# Altium PCB BRAKE_rev0.PcbDoc
Units mil, origin at the board's own origin, x right, y up, seen from the top; angles counter-clockwise.
Board outline 4575 x 4702.5 mil, 2 copper layers (Top Layer, Bottom Layer); 45 components, 63 nets, 192 pads, 24 vias.
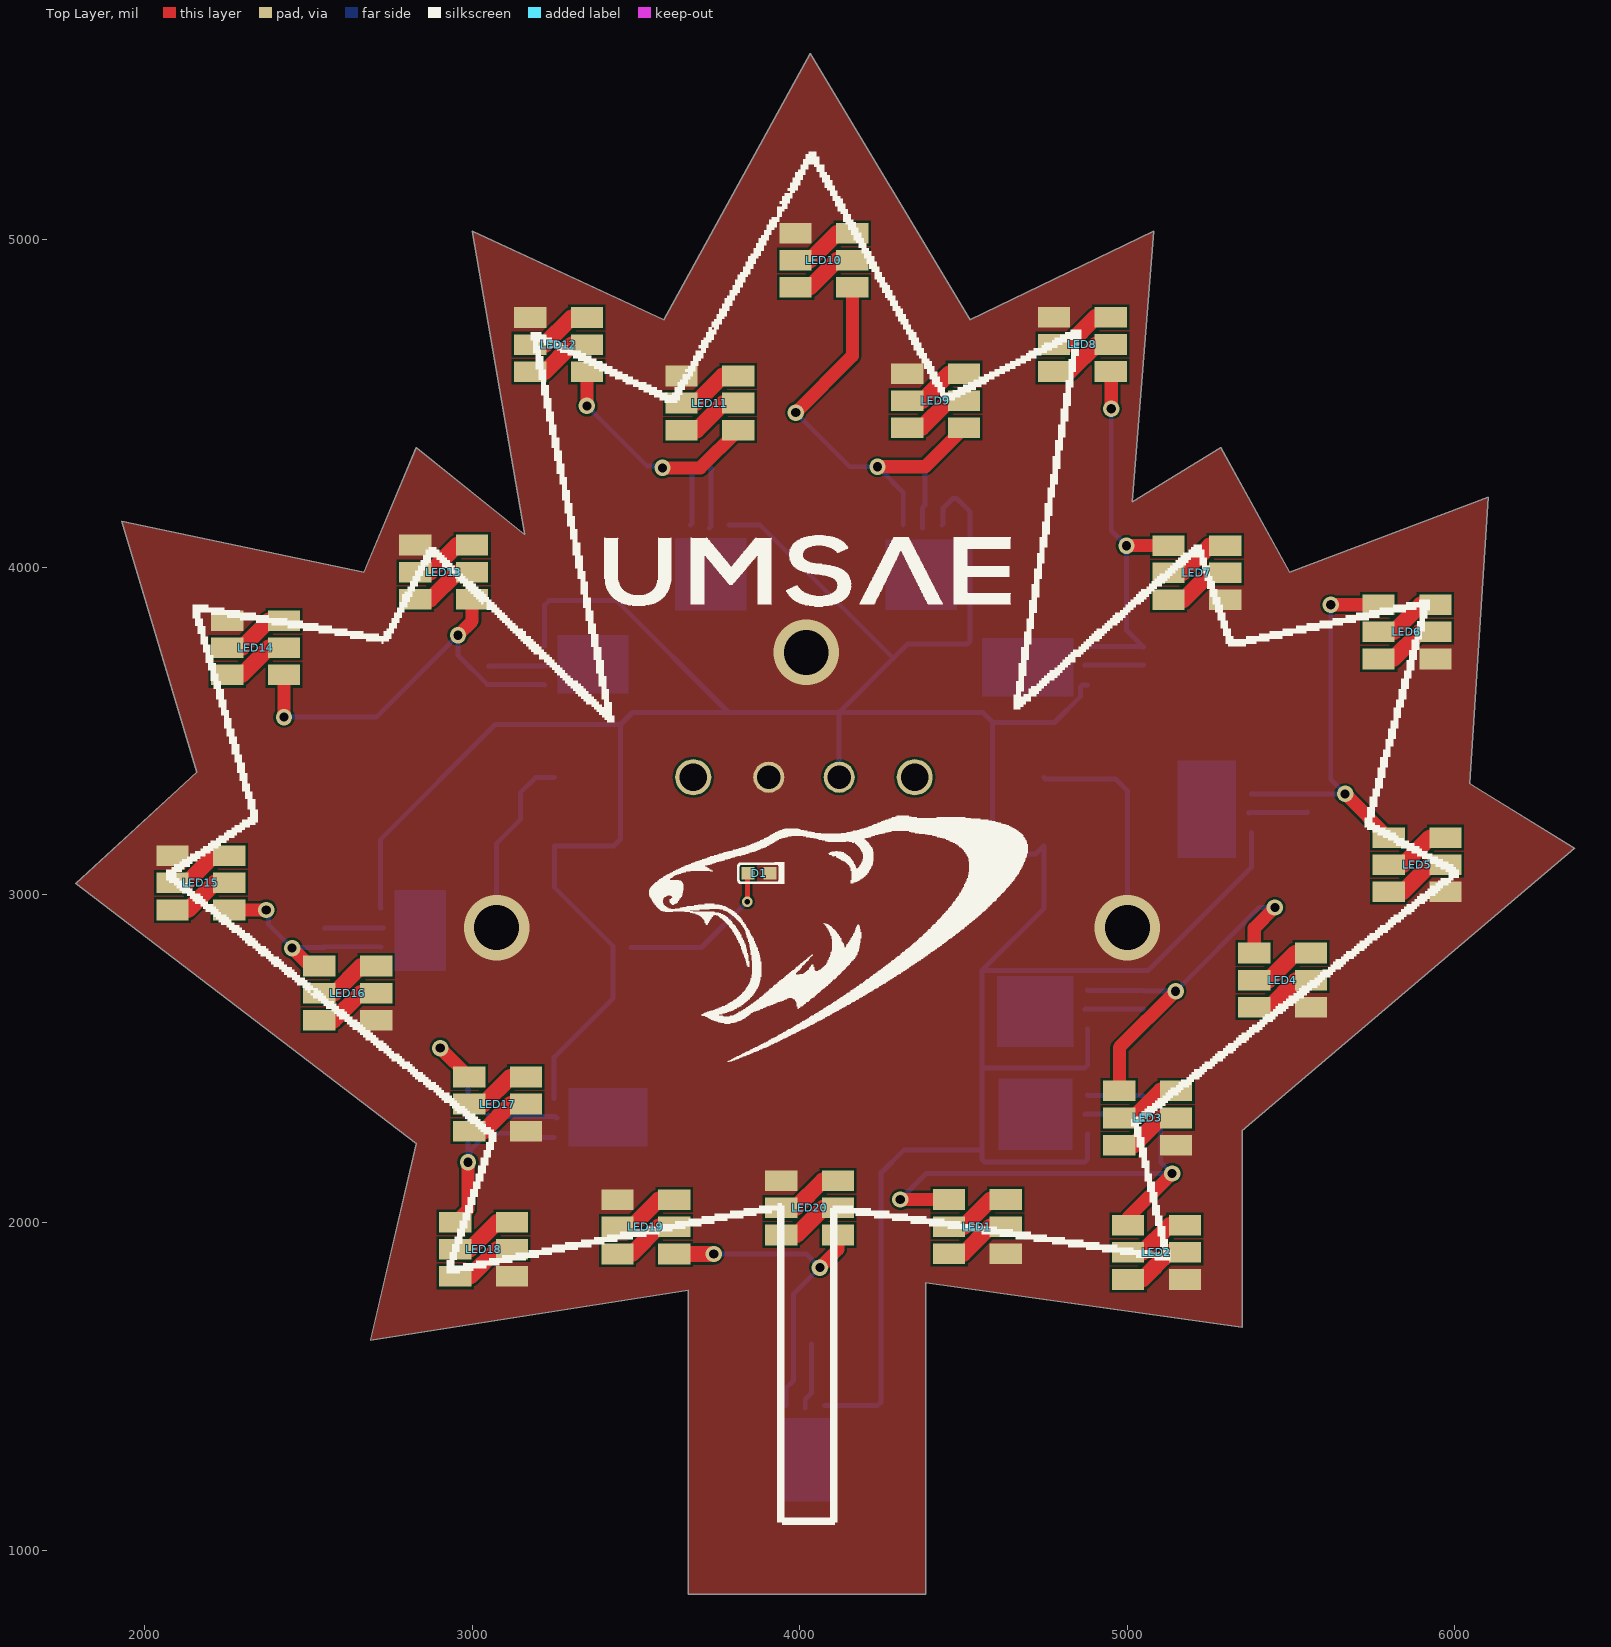
[diagram p0: Top Layer view]
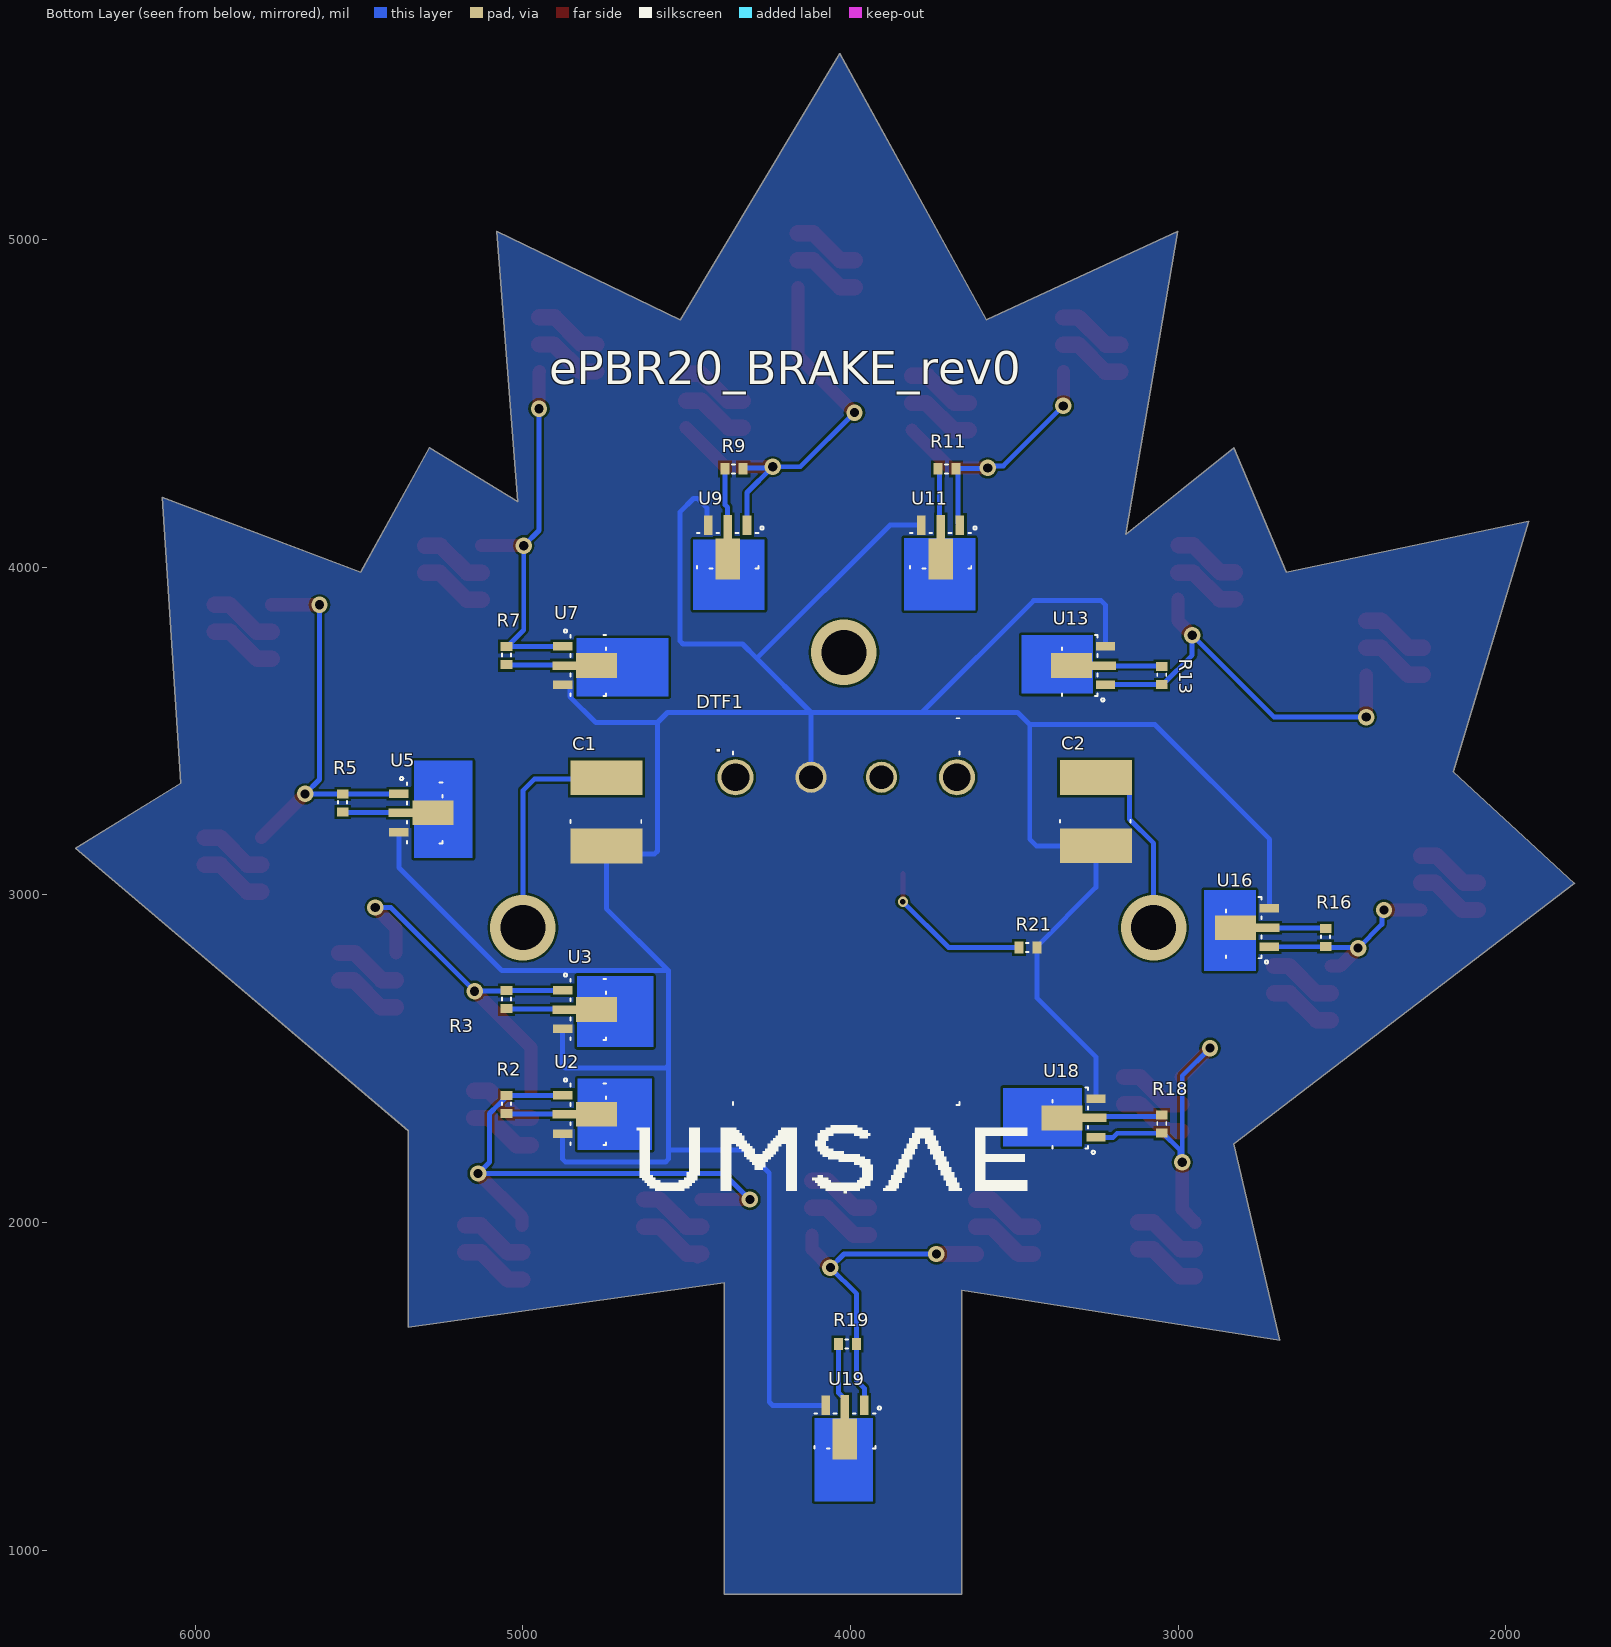
[diagram p1: Bottom Layer view, seen from below]

## Layer stack, top to bottom
Top Solder: solder mask 0.4, Solder Resist, Dk 3.5
Top Layer: signal copper 1.4
Dielectric 1: dielectric 12.6, FR-4, Dk 4.8
Bottom Layer: signal copper 1.4
Bottom Solder: solder mask 0.4, Solder Resist, Dk 3.5

## Board outline
3660,865 4385,865 4385,1816.65 5350,1679.78 5350,2280 6365,3142.5 6045,3340 6101.25,4213.75 5495,3985 5285,4365 5015,4200 5080,5025.84 4520,4755 4032.5,5567.5 3585,4755 3000.84,5025.84 3160,4100 2830,4365 2670,3985 1930,4140 2160,3375 1790,3035 2830,2240 2689.92,1640.52 3660,1793.56

## Design rules (kind name [scope] priority, off if disabled: settings)
Clearance [All] p1: gap=7 ignorepadtopadclearanceinfootprint=FALSE except(0: Arc-Hole Track-Hole SMDPad-Hole THPad-Hole Via-Hole Fill-Hole Poly-Hole Region-Hole Text-Hole)
HoleSize [All] p1: absolutevalues=TRUE maxlimit=200 minlimit=15 maxpercent=80.000 minpercent=20.000
HoleToHoleClearance [All] p1: gap=8 allowstackedmicrovias=TRUE
MinimumAnnularRing MinimumAnnularRing_Pad [IsPad] p1: minimumring=7
MinimumAnnularRing MinimumAnnularRing_Via [IsVia] p2: minimumring=5
MinimumSolderMaskSliver [All] p1: minsoldermaskwidth=4
PlaneClearance [All] p1: clearance=15
PlaneConnect PlaneConnect_12V [InNet('12V')] p1: planeconnectstyle=Direct reliefexpansion=20 reliefentries=4 reliefconductorwidth=20 reliefairgap=10
PlaneConnect PlaneConnect_1 [All] p2: planeconnectstyle=Relief reliefexpansion=15 reliefentries=4 reliefconductorwidth=15 reliefairgap=10
PolygonConnect [All] p1: connectstyle=Direct reliefconductorwidth=15 reliefentries=4 polygonreliefangle="90 Angle" airgapwidth=10
RoutingVias [All] p1: holewidth=17 width=31 viastyle="Through Hole" minholewidth=15 minwidth=29 maxholewidth=50 maxwidth=100
SilkToSilkClearance [All] p1: silktosilkclearance=7
SilkToSolderMaskClearance [IsPad] p1: minsilkscreentomaskgap=2 clearancetoexposedcopper=TRUE
SolderMaskExpansion [All] p1: expansion=3
Width [All] p1: maxlimit=200 minlimit=7 preferedwidth=15
23 further rules are at their usual default settings.

## Components (designator, comment, footprint, x,y, rotation, side; value= is the part's Value field where it differs from the comment)
C1 "Cap Semi" "2J-Lead 6.1 x 5.3" 4745,3255.3 r90 bottom value=33uF
C2 "Cap Semi" "2J-Lead 6.1 x 5.3" 3251,3256 r90 bottom value=33uF
D1 "BEAR EYE" TOSH-0603LED_RED_V 3876,3066 r180 top
DTF1 "DTF13-2P" DTF13-2P 4013,3359 r0 bottom
LED1 "3 LEDs" "3 CHANNEL LED" 4542.52,1987.4 r0 top
LED2 "3 LEDs" "3 CHANNEL LED" 5088.98,1908.66 r0 top
LED3 "3 LEDs" "3 CHANNEL LED" 5062.2,2318.9 r0 top
LED4 "3 LEDs" "3 CHANNEL LED" 5474.02,2739.76 r0 top
LED5 "3 LEDs" "3 CHANNEL LED" 5884.65,3092.13 r0 top
LED6 "3 LEDs" "3 CHANNEL LED" 5853.54,3802.76 r0 top
LED7 "3 LEDs" "3 CHANNEL LED" 5212.2,3983.07 r0 top
LED8 "3 LEDs" "3 CHANNEL LED" 4862.99,4679.92 r180 top
LED9 "3 LEDs" "3 channel led" 4414.96,4508.27 r180 top
LED10 "3 LEDs" "3 CHANNEL LED" 4074.02,4937.01 r180 top
LED11 "3 LEDs" "3 CHANNEL LED" 3725.59,4501.18 r180 top
LED12 "3 LEDs" "3 CHANNEL LED" 3263.78,4679.53 r180 top
LED13 "3 LEDs" "3 CHANNEL LED" 2913.39,3985 r180 top
LED14 "3 LEDs" "3 channel led" 2339.37,3753.94 r180 top
LED15 "3 LEDs" "3 CHANNEL LED" 2172.05,3036.61 r180 top
LED16 "3 LEDs" "3 CHANNEL LED" 2620.47,2700 r0 top
LED17 "3 LEDs" "3 channel led" 3077.56,2361.42 r0 top
LED18 "3 LEDs" "3 CHANNEL LED" 3035.04,1918.11 r0 top
LED19 "3 LEDs" "3 CHANNEL LED" 3530.31,1986.61 r180 top
LED20 "3 LEDs" "3 channel led" 4030.31,2044.49 r180 top
R2 "18" RESC0603(1608)_L 5050,2360 r270 bottom
R3 "18" RESC0603(1608)_L 5050,2680 r270 bottom
R5 "18" RESC0603(1608)_L 5550,3280 r270 bottom
R7 "18" RESC0603(1608)_L 5050,3730 r270 bottom
R9 "18" RESC0603(1608)_L 4355,4300 r0 bottom
R11 "18" RESC0603(1608)_L 3705,4300 r0 bottom
R13 "18" RESC0603(1608)_L 3050,3670 r90 bottom
R16 "18" RESC0603(1608)_L 2550,2870 r90 bottom
R18 "18" RESC0603(1608)_L 3050,2300 r90 bottom
R19 "18" RESC0603(1608)_L 4009,1629 r0 bottom
R21 "430" RESC0603(1608)_L 3458,2839.37 r180 bottom
U2 "LM317LCPK" LM317LCPK 4800,2330 r270 bottom
U3 "LM317LCPK" LM317LCPK 4800,2650 r270 bottom
U5 "LM317LCPK" LM317LCPK 5300,3250 r270 bottom
U7 "LM317LCPK" LM317LCPK 4800,3700 r270 bottom
U9 "LM317LCPK" LM317LCPK 4375,4050 r0 bottom
U11 "LM317LCPK" LM317LCPK 3725,4050 r0 bottom
U13 "LM317LCPK" LM317LCPK 3300,3700 r90 bottom
U16 "LM317LCPK" LM317LCPK 2800,2900 r90 bottom
U18 "LM317LCPK" LM317LCPK 3329,2319 r90 bottom
U19 "LM317LCPK" LM317LCPK 4016.94,1363.5 r0 bottom

## Footprints (in the part's own frame and the unit in brackets; to place one, negate y for a bottom-side part, rotate by r counter-clockwise, add the part's x,y. Pads: shape width x height; smd on the part's side, far side on the other; paste and mask are expansions set on the pad)
"2J-Lead 6.1 x 5.3" [mm]
  rect 2.7x5.6 smd: 1(-2.7,0) 2(2.6,0)
  silkscreen extent -0.9,-2.7 -0.69,2.8, body extent -3.4,-2.8 3.3,2.8, height 5
"3 CHANNEL LED" [mm]
  rect 2.5x1.6 smd: 1(-2.2,2.1) 2(-2.2,0) 3(-2.2,-2.1) 4(2.2,-2.1) 5(2.2,0) 6(2.2,2.1)
  body extent -2.1,-2.8 2.2,2.8, height 2.5
"3 channel led" [mm]
  rect 2.5x1.6 smd: 1(-2.2,2.1) 2(-2.2,0) 3(-2.2,-2.1) 4(2.2,-2.1) 5(2.2,0) 6(2.2,2.1)
  body extent -2.1,-2.8 2.2,2.8, height 2.5
DTF13-2P [mil]
  round 95 hole 72: 1(107.5,0) 2(-107.5,0)
  round 110 hole 84.02: MH(-338,0) MH(338,0)
  silkscreen extent -345,-180 345,1000, body extent -460,-180 466,1010, height 770
LM317LCPK [mil]
  rect 26x59 smd: 1(-59.06,-78.5) 3(59.06,-78.5)
  rect 26x80 smd: 2(0,-70)
  rect 75x125 smd: 2(0,25)
  silkscreen extent -110,-75 94,54, body extent -87,-93 90,73, height 65
RESC0603(1608)_L [mm]
  rect 0.7x0.9 smd: 1(-0.7,0) 2(0.7,0)
  silkscreen extent -0.16,-0.35 0.05,0.35, body extent -0.85,-0.47 0.85,0.47, height 0.6
TOSH-0603LED_RED_V [mm] "SMT LED, 2-Leads, Body 1.6x0.8mm (0603-Size)"
  rect 1x1 smd paste+0 mask+0: 1(0.85,0) 2(-0.85,0)
  silkscreen extent -1.97,-0.85 1.6,0.85, body extent -0.92,-0.53 1.09,0.53, height 0.6

## Part data
C1 C2: "Capacitor (Semiconductor SIM Model)", Supplier Part Number 1=490-5834-1-ND, LatestRevisionDate=29-May-2009, LatestRevisionNote="IPC-7351 Footprint Added.", PackageDescription="Chip Capacitor", PackageReference=C1206, Published=8-Jun-2000, Publisher="Altium Limited", Supplier 1=Digi-Key
D1: library part CMP-0444-00001-1, "LED, Red 0603 (1608) 63mCd", Forward Current="25 mA", Manufacturer=Toshiba, PartNumber=TLSU1008A(T04), Power Dissipation="60 mW", Reverse Voltage="4 V", Storage Temperature="-40 to 100 degC", Supplier Part Number 1=475-2512-1-ND, ComponentLink1Description="Manufacturer URL", ComponentLink1URL=http://www.toshiba-components.com/, ComponentLink2Description=Datasheet, ComponentLink2URL=http://www.semicon.toshiba.co.jp/info/docget.jsp?type=datasheet&lang=en&pid=TLSU1008A(T04), DatasheetVersion=Aug-08, Mounting Technology="Surface Mount", PackageDescription="2-Pin SMT LED, 1.6 x 0.8 mm Pitch", PackageReference=0603LED_RED, Packing Type=Reel, Supplier 1=Digi-Key
DTF1: "DEUTSCH Automotive; DT RECP ASM", Package=None, Digi-Key_Part_Number=1734-1033-ND, Digi-Key_Purchase_URL=https://www.digikey.ca/product-detail/en/te-connectivity-deutsch-connectors/DTF13-2P/1734-1033-ND/6566597?utm_source=snapeda&utm_medium=aggregator&utm_campaign=symbol, EU_RoHS_Compliance="Compliant with Exemptions", MF="TE Connectivity", MP=DTF13-2P, SnapEDA_Link=https://www.snapeda.com/parts/DTF13-2P/TE%20Connectivity%20Deutsch%20Connectors/view-part/?ref=snap, TE_purchase_URL=https://www.te.com/usa-en/product-DTF13-2P.html?te_bu=Cor&te_type=disp&te_campaign=seda_glo_cor-seda-global-disp-prtnr-fy19-seda-model-bom-cta_sma-317_1&elqCampaignId=32493
LED1 LED2 LED3 LED4 LED5 LED6 LED7 LED8 LED9 LED10 LED11 LED12 LED13 LED14 LED15 LED16 LED17 LED18 LED19 LED20: library part CLP6C-RKW-CYBA0AA3, Supplier Part Number 1=CLP6C-RKW-CYBA0AA3CT-ND, Supplier 1=Digi-Key
R2 R3 R5 R7 R9 R11 R13 R16 R18 R19: library part CMP-1591-00001-1, "0603 (1608 Metric) Chip Resistor", Case-EIA=0603, Case-Metric=1608, Supplier Part Number 1=P17.4AATR-ND, PackageReference=RESC0603(1608), Supplier 1=Digi-Key
R21: library part CMP-1591-00001-1, "0603 (1608 Metric) Chip Resistor", Case-EIA=0603, Case-Metric=1608, Supplier Part Number 1=P430BZCT-ND, PackageReference=RESC0603(1608), Supplier 1=Digi-Key
U2 U3 U5 U7 U9 U11 U13 U16 U18 U19: Supplier Part Number 1=296-26093-1-ND, Supplier 1=Digi-Key

## Via types
v1: diameter 50, hole 28, Top Layer to Bottom Layer, 20 vias
v2: diameter 200, hole 137, Top Layer to Bottom Layer, 3 vias
v3: diameter 31, hole 17, Top Layer to Bottom Layer, 1 vias

## Nets (pads, with @x,y where several pads share a name; then routed paths per layer and width w, separated by ;. In a path a pad name is that pad's centre, name@x,y a point inside that pad or via, vN(x,y) a via of type N, cw(c..) or ccw(c..) an arc to the next point about the centre after c; other vN are vias at no path point)
A1: LED1.2 LED1.6 | length 207.5
  Top Layer w50: LED1.2 4500.79,1987.4 4583.46,2070.08 LED1.6
A2: LED3.2 LED3.6 | length 207.5
  Top Layer w50: LED3.2 5019.29,2318.9 5101.97,2401.57 LED3.6
A3: LED5.2 LED5.6 | length 207.5
  Top Layer w50: LED5.2 5841.34,3092.13 5924.02,3174.8 LED5.6
A4: LED7.2 LED7.6 | length 207.5
  Top Layer w50: LED7.2 5169.29,3983.07 5251.97,4065.75 LED7.6
A5: LED10.2 LED10.6 | length 207.5
  Top Layer w50: LED10.6 4031.1,4854.33 4113.78,4937.01 LED10.2
A6: LED12.2 LED12.6 | length 207.5
  Top Layer w50: LED12.6 3222.44,4596.85 3305.12,4679.53 LED12.2
A7: LED15.2 LED15.6 | length 207.5
  Top Layer w50: LED15.6 2132.68,2953.94 2215.35,3036.61 LED15.2
A8: LED18.2 LED18.6 | length 207.5
  Top Layer w50: LED18.2 2993.31,1918.11 3075.98,2000.79 LED18.6
A9: LED2.2 LED2.6 | length 207.5
  Top Layer w50: LED2.2 5046.46,1908.66 5129.13,1991.34 LED2.6
A10: LED4.2 LED4.6 | length 207.5
  Top Layer w50: LED4.2 5430.71,2739.76 5513.39,2822.44 LED4.6
A11: LED6.2 LED6.6 | length 207.5
  Top Layer w50: LED6.2 5812.99,3802.76 5895.67,3885.43 LED6.6
A12: LED8.2 LED8.6 | length 207.5
  Top Layer w50: LED8.6 4822.83,4597.24 4905.51,4679.92 LED8.2
A13: LED11.2 LED11.6 | length 207.5
  Top Layer w50: LED11.6 3685.83,4418.5 3768.5,4501.18 LED11.2
A14: LED13.2 LED13.6 | length 207.3
  Top Layer w50: LED13.6@2826.02,3901.97 2872.44,3901.97 2953.94,3983.46 LED13.2@2999.61,3983.46
A15: LED16.2 LED16.6 | length 207.5
  Top Layer w50: LED16.2 2579.13,2700 2661.81,2782.68 LED16.6
A16: LED19.2 LED19.6 | length 207.5
  Top Layer w50: LED19.6 3487.01,1903.94 3569.69,1986.61 LED19.2
A17: LED9.2 LED9.6 | length 207.5
  Top Layer w50: LED9.6 4371.95,4425.59 4454.63,4508.27 LED9.2
A18: LED14.2 LED14.6 | length 207.5
  Top Layer w50: LED14.6 2297.24,3671.26 2379.92,3753.94 LED14.2
A19: LED17.2 LED17.6 | length 207.5
  Top Layer w50: LED17.2 3034.25,2361.42 3116.93,2444.09 LED17.6
A20: LED20.2 LED20.6 | length 207.5
  Top Layer w50: LED20.6 3990.16,1961.81 4072.83,2044.49 LED20.2
B1: LED1.3 LED1.5 | length 222.5
  Top Layer w40: LED1.3 LED1.3@4466.54,1894.09
  Top Layer w50: LED1.3 4499.21,1904.72 4581.89,1987.4 LED1.5
B2: LED3.3 LED3.5 | length 207.5
  Top Layer w50: LED3.3 5019.29,2236.22 5101.97,2318.9 LED3.5
B3: LED5.3 LED5.5 | length 207.5
  Top Layer w50: LED5.3 5841.34,3009.45 5924.02,3092.13 LED5.5
B4: LED7.3 LED7.5 | length 207.5
  Top Layer w50: LED7.3 5171.26,3900.39 5253.94,3983.07 LED7.5
B5: LED10.3 LED10.5 | length 207.5
  Top Layer w50: LED10.5 4031.1,4937.01 4113.78,5019.69 LED10.3
B6: LED12.3 LED12.5 | length 207.5
  Top Layer w50: LED12.5 3221.26,4679.53 3303.94,4762.2 LED12.3
B7: LED15.3 LED15.5 | length 207.5
  Top Layer w50: LED15.5 2128.74,3036.61 2211.42,3119.29 LED15.3
B8: LED18.3 LED18.5 | length 207.5
  Top Layer w50: LED18.3 2993.7,1835.43 3076.38,1918.11 LED18.5
B9: LED2.3 LED2.5 | length 208.2
  Top Layer w50: LED2.3 5045.65,1825.98 5083.57,1863.91 5083.57,1865.17 5127.07,1908.66 LED2.5
B10: LED4.3 LED4.5 | length 207.5
  Top Layer w50: LED4.3 5433.46,2657.09 5516.14,2739.76 LED4.5
B11: LED6.3 LED6.5 | length 207.5
  Top Layer w50: LED6.3 5811.02,3720.08 5893.7,3802.76 LED6.5
B12: LED8.3 LED8.5 | length 207.5
  Top Layer w50: LED8.5 4820.08,4679.92 4902.76,4762.6 LED8.3
B13: LED11.3 LED11.5 | length 207.5
  Top Layer w50: LED11.5 3682.68,4501.18 3765.35,4583.86 LED11.3
B14: LED13.3 LED13.5 | length 205.6
  Top Layer w50: LED13.5 2872.01,3985 2953.94,4066.93 LED13.3@2998.43,4066.93
B15: LED16.3 LED16.5 | length 207.5
  Top Layer w50: LED16.3 2577.17,2617.32 2659.84,2700 LED16.5
B16: LED19.3 LED19.5 | length 207.5
  Top Layer w50: LED19.5 3487.01,1986.61 3569.69,2069.29 LED19.3
B17: LED9.3 LED9.5 | length 207.5
  Top Layer w50: LED9.5 4374.02,4508.27 4456.69,4590.94 LED9.3
B18: LED14.3 LED14.5 | length 207.5
  Top Layer w50: LED14.5 2296.85,3753.94 2379.53,3836.61 LED14.3
B19: LED17.3 LED17.5 | length 207.5
  Top Layer w50: LED17.3 3035.43,2278.74 3118.11,2361.42 LED17.5
B20: LED20.3 LED20.5 | length 207.5
  Top Layer w50: LED20.5 3987.4,2044.49 4070.08,2127.17 LED20.3
GND: C1.2 C2.2 D1.2 DTF1.2 LED1.4 LED2.4 LED3.4 LED4.4 LED5.4 LED6.4 LED7.4 LED8.4 LED9.4 LED10.4 LED11.4 LED12.4 LED13.4 LED14.4 LED15.4 LED16.4 LED17.4 LED18.4 LED19.4 LED20.4 | length 1254.1
  Bottom Layer w15: v2(3075,2900) 3075,3157.59 3148.26,3230.86 3148.26,3312.71 3193.91,3358.36 C2.2 ; C1.2 4748.66,3354 4964,3354 5000,3318 v2(5000,2900)
  other v2: 4020,3740
NetD1_1: D1.1 R21.1 | length 499.3
  Top Layer w15: v3(3840,2979) D1.1@3840,3066
  Bottom Layer w15: R21.1 3700.37,2839.37 v3(3840,2979)
NetLED1_1: LED1.1 LED2.1 R2.1 U2.1 | length 1669.3
  Top Layer w40: v1(4307.09,2070.08) LED1.1 ; LED2.1 5002.36,2015.35 v1(5136.61,2149.61)
  Bottom Layer w15: v1(4307.09,2070.08) 4386.61,2149.61 v1(5136.61,2149.61) 5102,2184.22 5102,2332.44 5073.72,2360.72 5072.9,2360.72 5046.06,2387.56 4880,2387.56 U2.1
NetLED3_1: LED3.1 LED4.1 R3.1 U3.1 | length 1219.5
  Top Layer w40: LED3.1 4975.59,2534.25 v1(5147.24,2705.91) ; LED4.1 5387.4,2898.43 v1(5450.39,2961.42)
  Bottom Layer w15: U3.1 4879.25,2708.31 5049.25,2708.31 R3.1 5050.83,2706.73 5146.42,2706.73 v1(5147.24,2705.91) 5402.76,2961.42 v1(5450.39,2961.42)
NetLED5_1: LED5.1 LED6.1 R5.1 U5.1 | length 1217.1
  Top Layer w40: v1(5620.87,3885.43) LED6.1 ; v1(5664.57,3308.27) LED5.1
  Bottom Layer w15: U5.1 5379.25,3308.31 5549.25,3308.31 R5.1 5550.35,3307.91 5664.21,3307.91 v1(5664.57,3308.27) 5620.87,3351.97 v1(5620.87,3885.43)
NetLED7_1: LED7.1 LED8.1 R7.1 U7.1 | length 1183.5
  Top Layer w40: LED8.1 4950.79,4596.06 v1(4950.79,4483.86) ; v1(4997.24,4065.75) LED7.1
  Bottom Layer w15: U7.1 4879.25,3758.31 R7.1@5045.31,3758.31 ; v1(4950.79,4483.86) 4950.79,4112.2 v1(4997.24,4065.75) 4997.24,3808.32 5039.78,3765.78 5039.78,3763.84 R7.1@5045.31,3758.31 ; R7.1@5049,3756.56 5047.06,3756.56 R7.1@5045.31,3758.31 ; R7.1 5049.25,3758.31 R7.1@5045.31,3758.31
NetLED9_1: LED9.1 LED10.1 R9.1 U9.1 | length 1384.2
  Top Layer w40: v1(3987.8,4472.05) 4160.63,4644.88 LED10.1 ; v1(4237.4,4306.69) 4382.68,4306.69 LED9.1
  Bottom Layer w15: v1(3987.8,4472.05) 4153.15,4306.69 v1(4237.4,4306.69) v1@4240.75,4303.35 ; U9.1 4315.94,4228.15 v1@4240.75,4303.35 ; R9.1 4324.09,4303.35 v1@4240.75,4303.35
NetLED11_1: LED11.1 LED12.1 R11.1 U11.1 | length 966.3
  Top Layer w40: v1(3350.39,4492.52) LED12.1 ; v1(3581.1,4303.15) 3696.85,4303.15 LED11.1
  Bottom Layer w15: v1(3350.39,4492.52) 3533.6,4309.31 3574.94,4309.31 v1(3581.1,4303.15) 3582.68,4301.57 3675.87,4301.57 R11.1 3671.44,4294 3671.44,4134 U11.1
NetLED13_1: LED13.1 LED14.1 R13.1 U13.1 | length 1254
  Top Layer w40: v1(2425.98,3542.52) LED14.1 ; v1(2957.09,3792.52) 3000,3835.43 LED13.1
  Bottom Layer w15: v1(2425.98,3542.52) 2707.09,3542.52 v1(2957.09,3792.52) 2957.09,3731.42 3046.06,3642.44 R13.1 3050.75,3641.69 3220.75,3641.69 U13.1
NetLED15_1: LED15.1 LED16.1 R16.1 U16.1 | length 641.5
  Top Layer w40: LED15.1 v1(2371.65,2953.94) ; v1(2450.79,2837.4) 2505.51,2782.68 LED16.1
  Bottom Layer w15: v1(2371.65,2953.94) 2378.35,2947.24 2378.35,2909.84 v1(2450.79,2837.4) 2453.31,2839.92 2547.48,2839.92 R16.1 2550.75,2841.69 2720.75,2841.69 U16.1
NetLED17_1: LED17.1 LED18.1 R18.1 U18.1 | length 1029.9
  Top Layer w40: v1(2902.76,2532.28) LED17.1 ; LED18.1 2987.4,2039.76 v1(2987.4,2183.86)
  Bottom Layer w15: v1(2902.76,2532.28) 2987.4,2447.64 v1(2987.4,2183.86) 2994.1,2190.56 2994.1,2220.48 3046.06,2272.44 R18.1 3186,2272.44 3198.5,2259.94 U18.1
NetLED19_1: LED19.1 LED20.1 R19.1 U19.1 | length 1053.6
  Top Layer w40: v1(4061.42,1862.2) 4116.93,1917.72 LED20.1
  Top Layer w50: LED19.1 v1(3737.8,1903.94)
  Bottom Layer w15: v1@3742.12,1899.61 v1(3737.8,1903.94) 4019.68,1903.94 v1(4061.42,1862.2) 3981.44,1782.23 R19.1 3981.44,1517.55 3957.89,1494 U19.1
NetR2_2: R2.2 U2.2 | length 182.7
  Bottom Layer w15: U2.2@4870,2330 4871.22,2331.22 5039.78,2331.22 5039.78,2330 5042.22,2332.44 R2.2
NetR3_2: R3.2 U3.2 | length 181
  Bottom Layer w15: U3.2@4870,2650 4871.22,2651.22 5048.78,2651.22 R3.2
NetR5_2: R5.2 U5.2 | length 181
  Bottom Layer w15: U5.2@5370,3250 5371.22,3251.22 5548.78,3251.22 R5.2
NetR7_2: R7.2 U7.2 | length 181
  Bottom Layer w15: U7.2@4870,3700 4871.22,3701.22 5048.78,3701.22 R7.2
NetR9_2: R9.2 U9.2 | length 183.1
  Bottom Layer w15: U9.2@4375,4120 4375,4182.5 4382.56,4190.06 R9.2
NetR11_2: R11.2 U11.2 | length 183.1
  Bottom Layer w15: U11.2@3725,4120 3728.78,4123.78 3728.78,4296.22 R11.2
NetR13_2: R13.2 U13.2 | length 181
  Bottom Layer w15: R13.2 3051.22,3698.78 3228.78,3698.78 U13.2@3230,3700
NetR16_2: R16.2 U16.2 | length 181
  Bottom Layer w15: R16.2 2551.22,2898.78 2728.78,2898.78 U16.2@2730,2900
NetR18_2: R18.2 U18.2 | length 212.5
  Bottom Layer w15: R18.2 3054.28,2323.28 3254.72,2323.28 U18.2@3259,2319
NetR19_2: R19.2 U19.2 | length 203.6
  Bottom Layer w15: U19.2@4016.94,1433.5 4016.94,1460.5 4036.56,1480.11 R19.2
VCC: C1.1 C2.1 DTF1.1 R21.2 U2.3 U3.3 U5.3 U7.3 U9.3 U11.3 U13.3 U16.3 U18.3 U19.3 | length 11556.5
  Bottom Layer w15: U16.3 2720.75,2959.8 2720.75,3169.59 3071.16,3520 3453,3520 ; U13.3 3221.5,3884.5 3235,3898 3441,3898 3782.5,3556.5 ; U18.3 3250.5,2504.5 3430.44,2684.44 R21.2 3430.44,2843.31 3251,3022.75 C2.1 3433.11,3149.7 3453,3169.59 3453,3520 ; U11.3 3879.5,4128.5 4286,3722 ; U19.3 4238,1442 4248,1452 4248,2151 4318,2221 4556,2221 ; DTF1.1 4120.5,3556.5 ; U9.3 4437.5,4131.94 4437.5,4180.5 4466.79,4209.79 4479.21,4209.79 4520,4169 4520,3774.56 4511.21,3765.78 4329.78,3765.78 4286,3722 ; U2.3 4878.5,2193.01 4869.71,2184.22 4564.79,2184.22 4556,2193.01 4556,2221 ; U3.3 4879.25,2590.2 4879.25,2479.79 4870.46,2471 4564.79,2471 4556,2479.79 ; U7.3 4862,3640.94 4856.5,3635.44 4856.5,3604.99 4777.51,3526 4589,3526 ; U5.3 5378.5,3083.5 5064,2769 4556,2769 ; 3453,3520 3489.5,3556.5 3782.5,3556.5 ; 3782.5,3556.5 4120.5,3556.5 ; 4120.5,3556.5 4558.5,3556.5 4589,3526 ; 4120.5,3556.5 4286,3722 ; 4556,2221 4556,2479.79 ; 4556,2479.79 4556,2769 ; 4556,2769 4745,2958 C1.1 4721.21,3125.21 4597.79,3125.21 4589,3134 4589,3526
pads on no net: DTF1.MH

## Polygon pours and split planes (outlines as drawn)
GND on Top Layer "Top Layer - GND" (solid, pour order 0): 3660,865 4385,865 4385,1816.65 5350,1679.78 5350,2280 6365,3142.5 6045,3340 6101.25,4213.75 5495,3985 5285,4365 5015,4200 5080,5025.84 4520,4755 4032.5,5567.5 3585,4755 3000.84,5025.84 3160,4100 2830,4365 2670,3985 1930,4140 2160,3375 1790,3035 2830,2240 2689.92,1640.52 3660,1793.56
VCC on Bottom Layer "Bottom Layer - VCC" (solid, pour order 3): 3660,865 4385,865 4385,1816.65 5350,1679.78 5350,2280 6365,3142.5 6045,3340 6101.25,4213.75 5495,3985 5285,4365 5015,4200 5080,5025.84 4520,4755 4032.5,5567.5 3585,4755 3000.84,5025.84 3160,4100 2830,4365 2670,3985 1930,4140 2160,3375 1790,3035 2830,2240 2689.92,1640.52 3660,1793.56

## Other copper
Bottom Layer:
  rectangle net NetR2_2: 4606,2221 4833,2439
  rectangle net NetR3_2: 4602,2535 4835,2753
  rectangle net NetR5_2: 5153,3112 5332,3410
  region net NetR7_2: 4556,3784 4556,3605 4836,3605 4836,3784
  region net NetR9_2: 4262,4085 4262,3869 4480,3869 4480,4085
  region net NetR11_2: 3619,4089 3619,3868 3837,3868 3837,4089
  region net NetR16_2: 2921,3015 2763,3015 2763,2768 2921,2768
  region net NetR13_2: 3478,3614 3478,3793 3260,3793 3260,3614
  region net NetR18_2: 3535,2232 3535,2411 3294,2411 3294,2232
  rectangle net NetR19_2: 3931,1148 4110,1403
  region: 2400.79,3904.33

## Silkscreen, mask and mechanical layers (free items; w line width, h text height)
Top Overlay:
  drawing of 7 lines, arcs and shapes, not listed
Bottom Overlay:
  drawing of 5 lines, arcs and shapes, not listed
  text "ePBR20_BRAKE_rev0" at 4919,4559 h100
Board Outline:
  lines w10: 3660,865 3660,1794 2690,1641 2830,2240 1790,3034 2160,3375 1929,4140 2668,3984 2830,4365 3160,4100 3001,5026 3585,4755 4032,5568 4521.42,4753.17 5080,5029 5013,4201 5282,4369 5494,3983 6102,4216 6043,3342 6364,3141 5351,2280 5350,1679 4385,1818 4385,866 3660,866